# Altium PCB Export_PCB.PcbDoc (part 3 of 7)
Units mm, origin at the board's own origin, x right, y up, seen from the top; angles counter-clockwise.
Board outline 93 x 90 mm, 6 copper layers (Top_1, GND_2, SIGNAL_3, PWR_4, GND_5, Bottom_6), stack 1.606 mm thick; 470 components, 374 nets, 2145 pads, 1031 vias.
Unrouted connection lines stored in the file: 451.
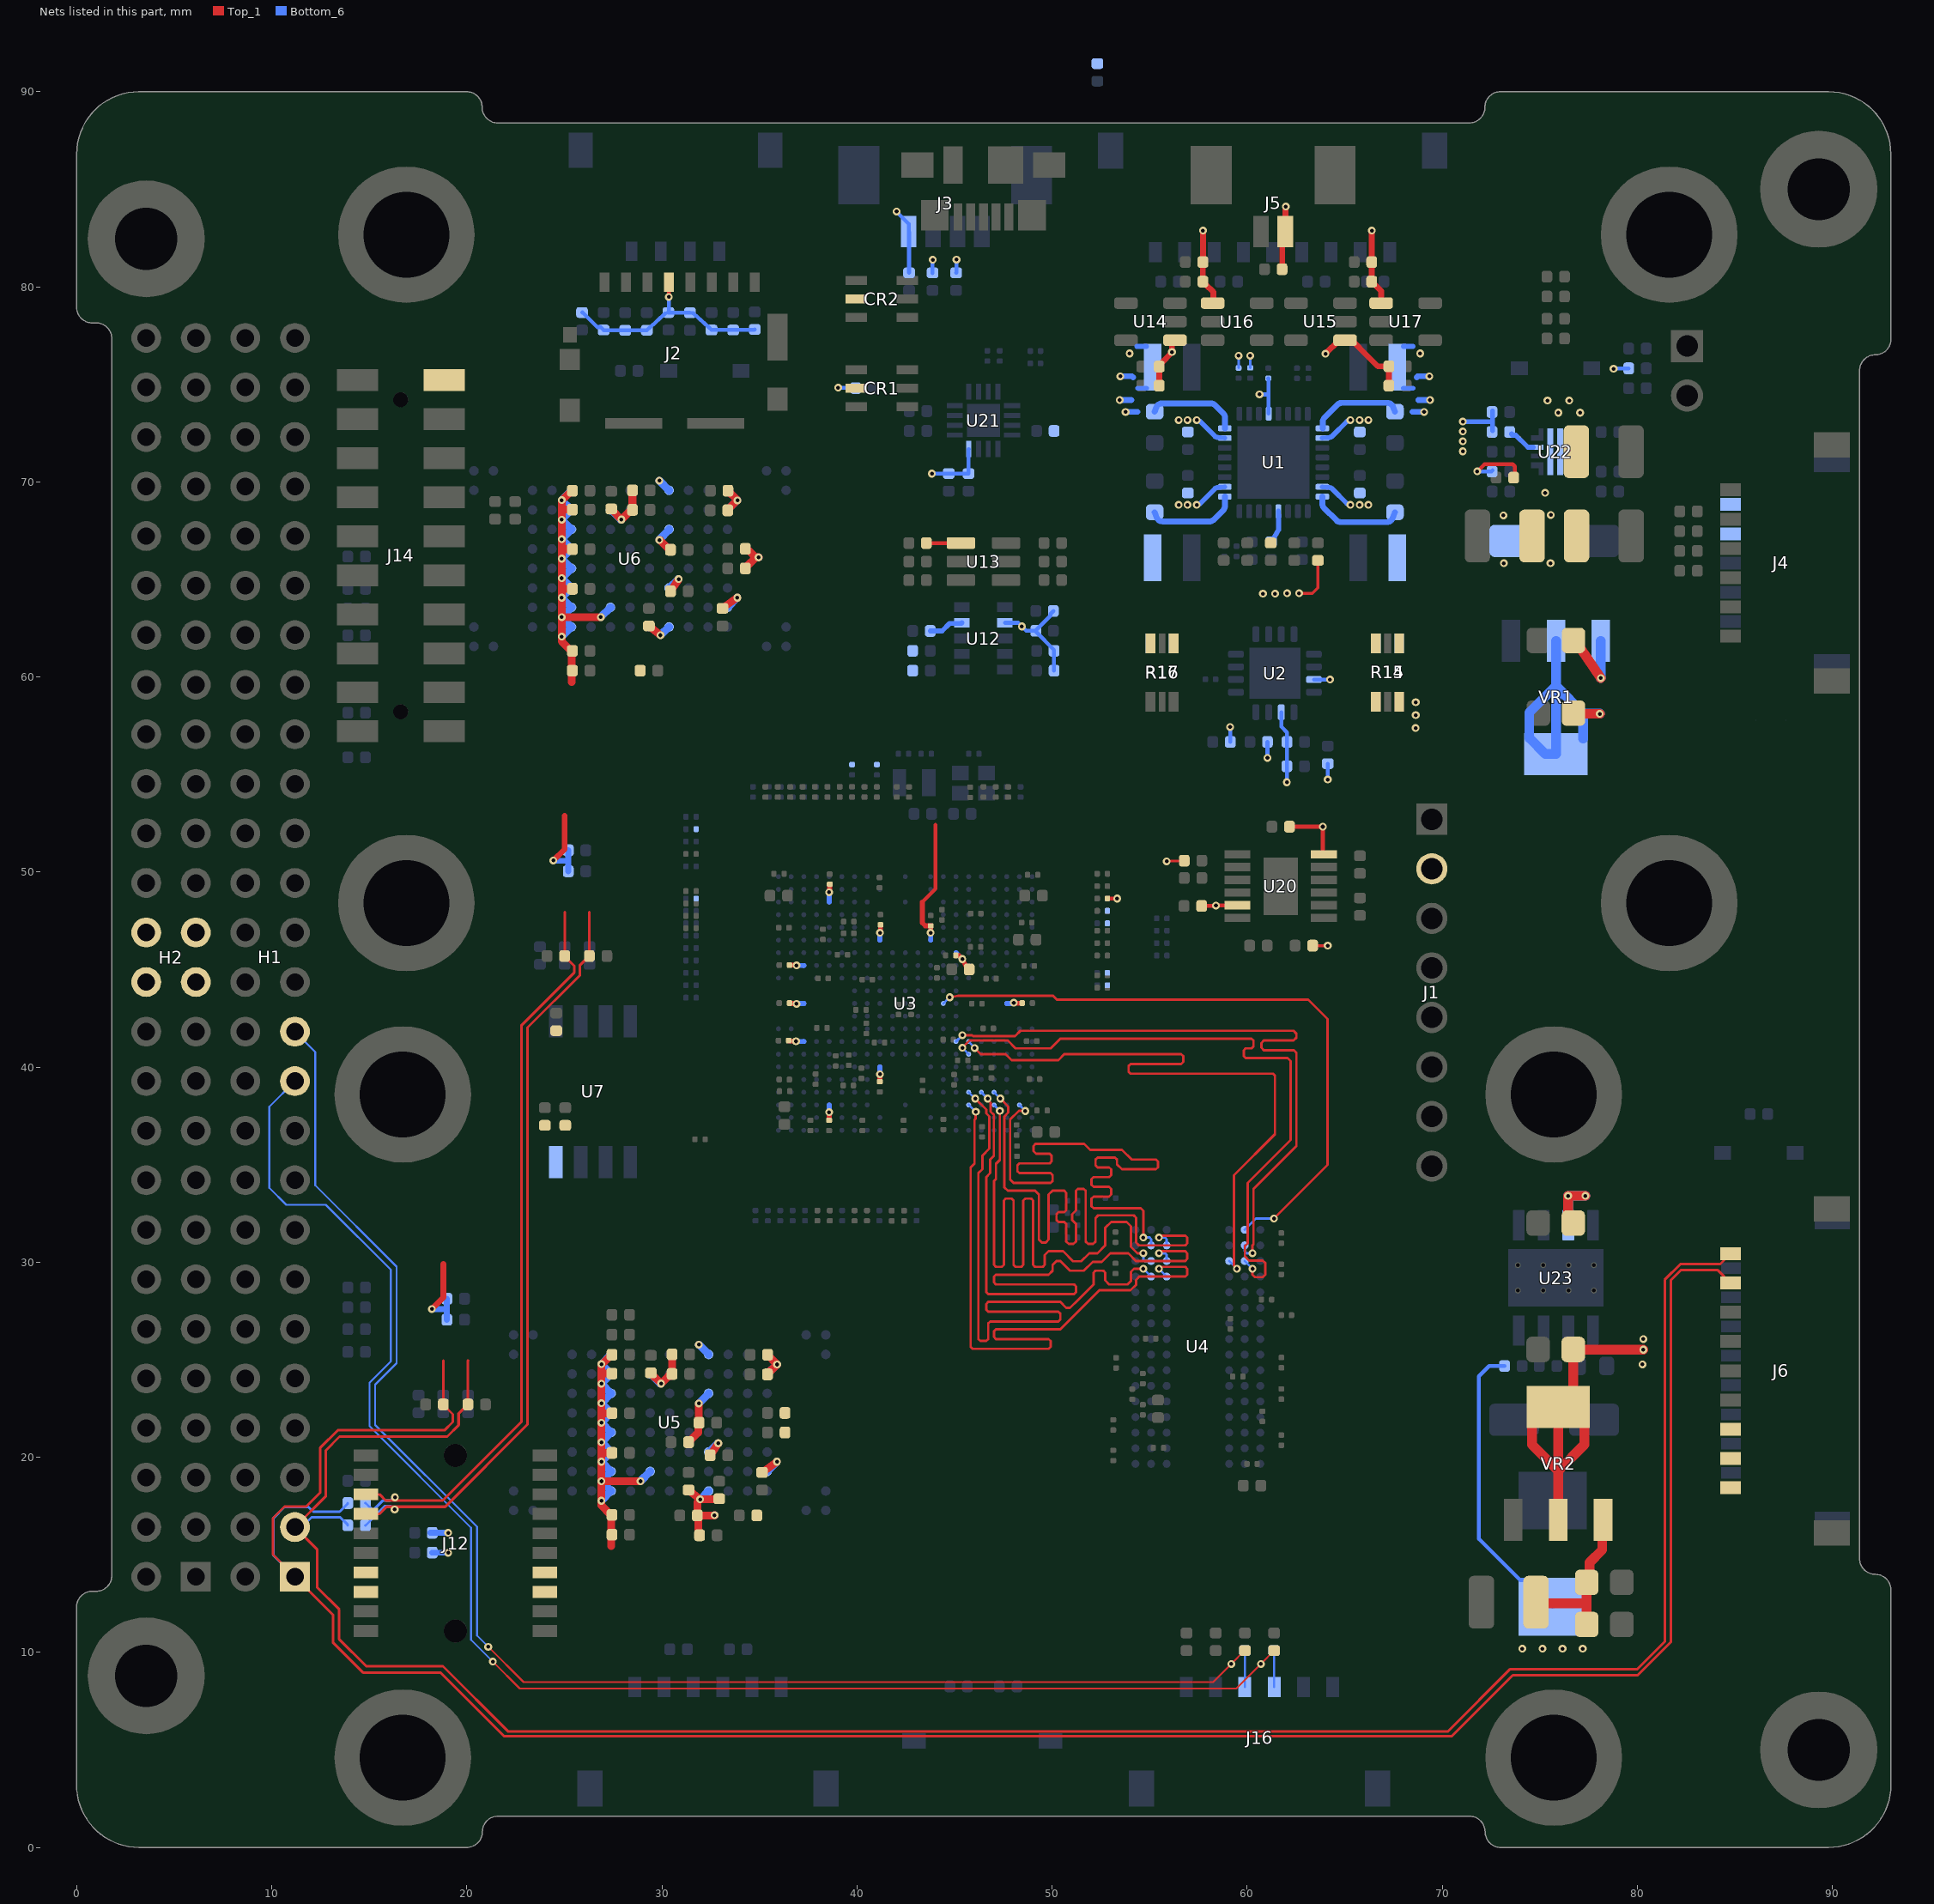
[diagram p5: the nets of this part, all layers, seen from the top]

## Via types
v1: diameter 0.4, hole 0.2, Top_1 to Bottom_6, 870 vias
v2: diameter 0.4, hole 0.2, Top_1 to Bottom_6, tented both sides, 160 vias
v3: diameter 0.4, hole 0.15, Top_1 to Bottom_6, 1 vias

## Nets (pads, with @x,y where several pads share a name; then routed paths per layer and width w, separated by ;. In a path a pad name is that pad's centre, name@x,y a point inside that pad or via, vN(x,y) a via of type N, cw(c..) or ccw(c..) an arc to the next point about the centre after c; other vN are vias at no path point) (continued)
DDR_A9: (continued)
  Top_1 w0.125: v1(47.353,38.387) 47.757,37.982 47.757,37.667 47.555,37.465 47.555,34.801 47.555,33.835 47.728,33.662 49.128,33.662 49.328,33.462 49.328,31.162 49.478,31.012 49.678,31.012 49.828,31.162 49.828,33.462 50.028,33.662 50.628,33.662 50.728,33.562 50.728,32.662 50.628,32.562 50.328,32.562 50.228,32.462 50.228,32.162 50.328,32.062 50.628,32.062 50.728,31.962 50.728,31.062 50.853,30.937 51.103,30.937 51.228,31.062 51.228,31.962 51.028,32.162 51.028,32.462 51.228,32.662 51.228,33.662 51.328,33.762 51.628,33.762 51.728,33.662 51.728,31.062 51.853,30.937 52.103,30.937 52.228,31.062 52.228,32.262 52.366,32.399 54.191,32.399 54.303,32.287 54.303,31.012 54.453,30.862 55.728,30.862 56.828,30.862 56.928,30.962 56.928,31.262 56.828,31.362 55.578,31.362 v1(55.478,31.262)
  Bottom_6 w0.125: U3.V4@47.028,38.712 v1(47.353,38.387) ; v1(55.478,31.262) 55.803,31.262 55.878,31.187 U4.R3@55.878,30.862